# Altium PCB 56PCB -111.pcbdoc
Units mm, origin at the board's own origin, x right, y up, seen from the top; angles counter-clockwise.
Board outline 72.11 x 47.44 mm, 2 copper layers (Top Layer, Bottom Layer); 76 components, 155 nets, 310 pads, 138 vias.
Unrouted connection lines stored in the file: 101.
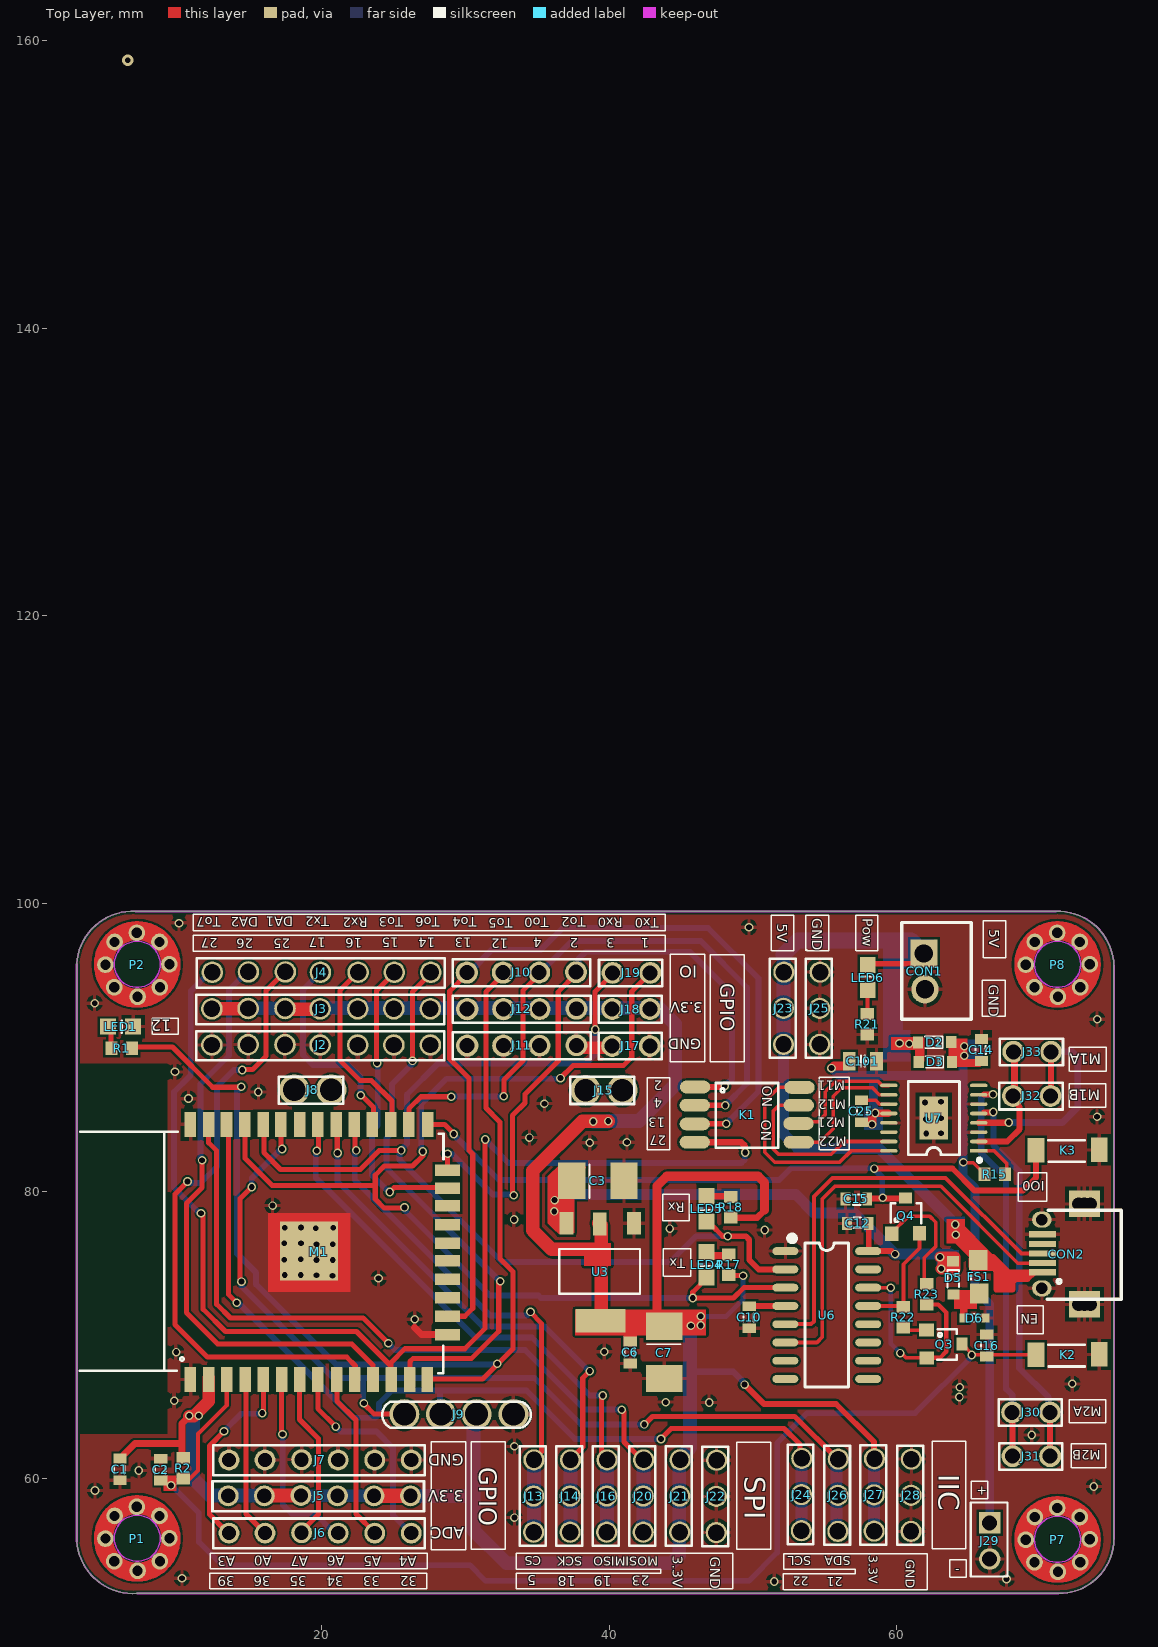
[diagram p0: Top Layer view]
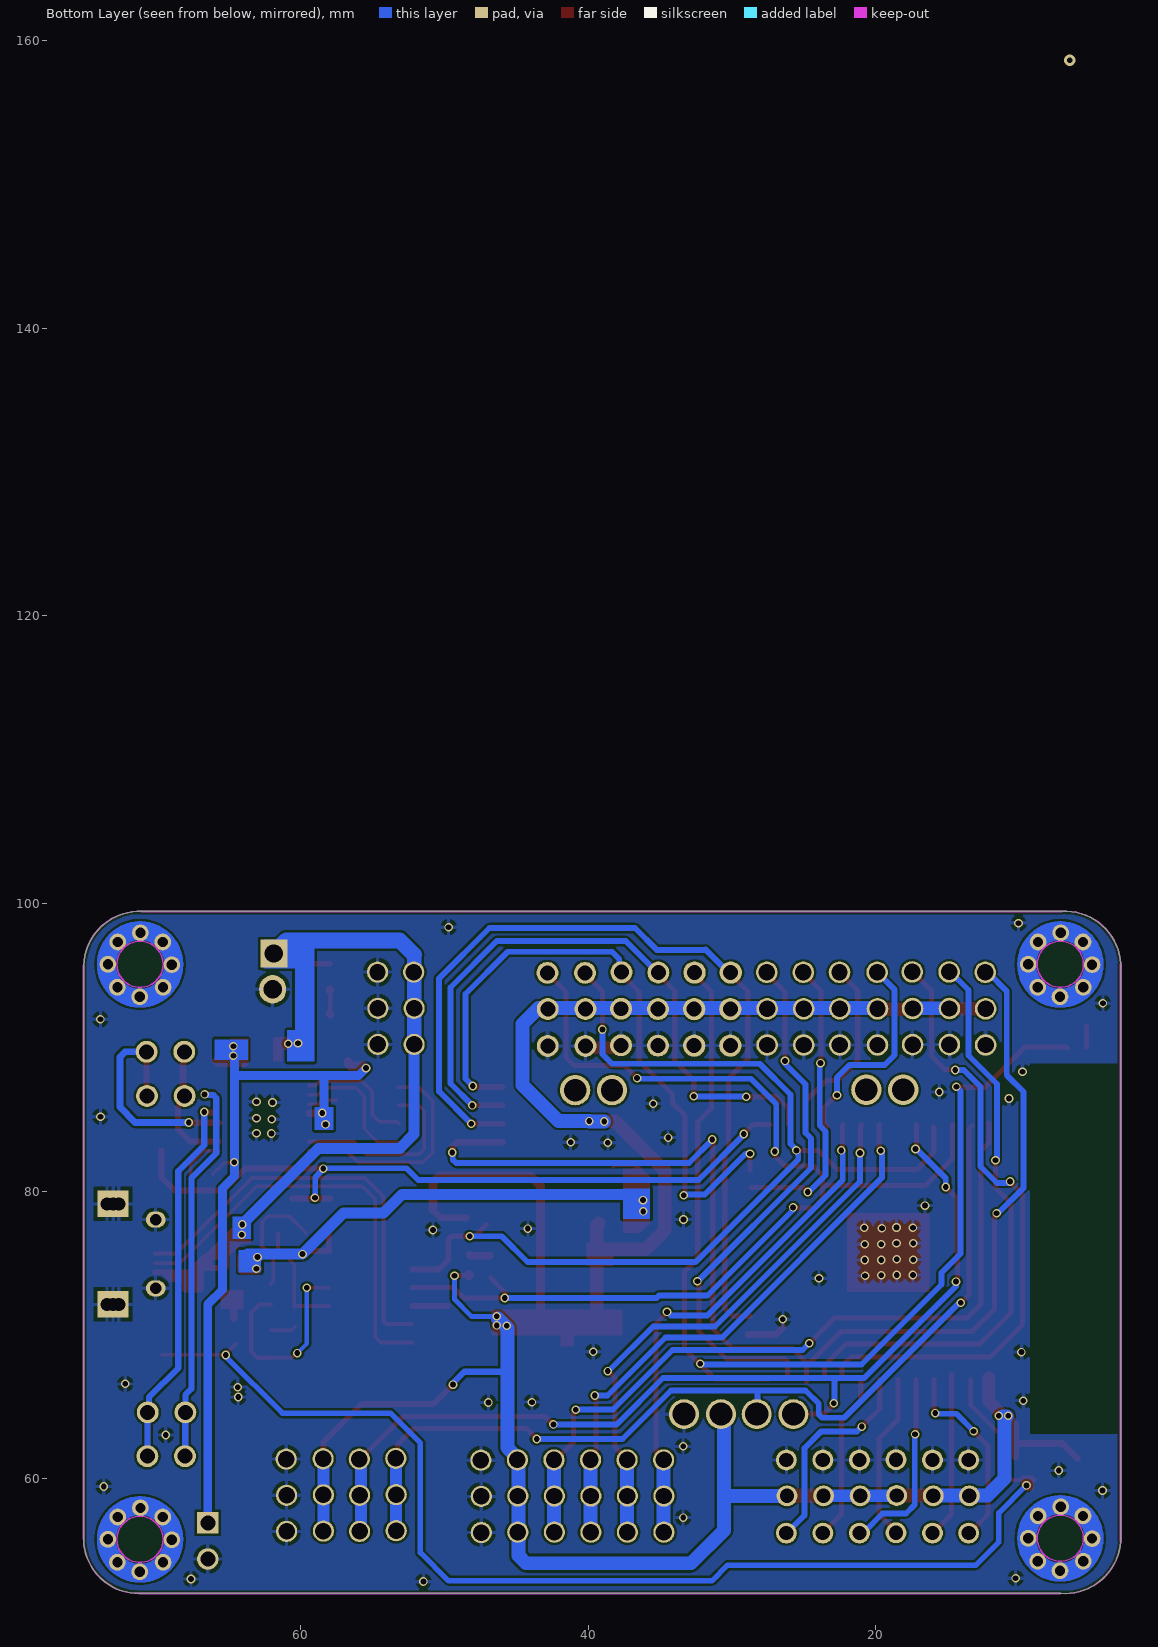
[diagram p1: Bottom Layer view, seen from below]

## Layer stack, top to bottom
Top Solder: solder mask 0.0102, Solder Resist, Dk 3.5
Top Layer: signal copper 0.0356
Dielectric 1: dielectric 0.32, FR-4, Dk 4.8
Bottom Layer: signal copper 0.0356
Bottom Solder: solder mask 0.0102, Solder Resist, Dk 3.5

## Board outline
2.975,55.651 2.975,95.783 cw(c6.847,95.569) 7.061,99.441 71.044,99.441 cw(c71.183,95.542) 75.082,95.682 75.082,55.804 cw(c71.26,55.842) 71.222,52.019 7.163,52.019 cw(c6.885,55.929)

## Design rules (kind name [scope] priority, off if disabled: settings)
Clearance [All] p1: gap=0.152 ignorepadtopadclearanceinfootprint=FALSE
HoleToHoleClearance [All] p1: gap=0.203 allowstackedmicrovias=TRUE
PolygonConnect [All] p1: connectstyle=Relief reliefconductorwidth=0.254 reliefentries=4 polygonreliefangle="90 Angle" airgapwidth=0.254
RoutingVias [All] p1: holewidth=6 width=8 viastyle="Through Hole" minholewidth=0.3 minwidth=0.6 maxholewidth=0.711 maxwidth=1.27
SilkToSilkClearance [All] p1: silktosilkclearance=0.152
SolderMaskExpansion [All] p1: expansion=0.102
Width [All] p1: maxlimit=5 minlimit=0.203 preferedwidth=0.254
28 further rules are at their usual default settings.

## Components (designator, comment, footprint, x,y, rotation, side; value= is the part's Value field where it differs from the comment)
C1 "104" COMPONENT_13 5.972,60.649 r90 top
C2 "104" COMPONENT_13 8.817,60.623 r90 top
C3 "100UF/10V" COMPONENT_17 39.195,80.715 r180 top
C6 "104" COMPONENT_13 41.456,68.777 r90 top
C7 "100UF/10V" COMPONENT_17 43.818,68.777 r90 top
C10 "104" COMPONENT_13 49.733,71.222 r90 top
C12 "104" COMPONENT_13 57.277,77.749 r0 top
C14 "104" COMPONENT_13 65.865,89.808 r90 top
C15 "104" COMPONENT_13 57.175,79.451 r180 top
C16 "104" COMPONENT_13 66.246,69.259 r90 top
C25 "10nf" COMPONENT_13 57.531,85.547 r270 top
C101 "10UF" "C 0805_L" 57.633,89.027 r180 top
CON1 "XH2.54MM*2P直针插座" COMPONENT_24 61.903,95.269 r90 top
CON2 "安卓尾插牛角5针USB插座" COMPONENT_25 71.656,75.609 r90 top
D2 "S4" COMPONENT_21 62.614,90.341 r0 top
D3 "S4" COMPONENT_21 62.665,88.97 r0 top
D5 "S4" COMPONENT_21 63.909,73.958 r90 top
D6 "NC" COMPONENT_22 65.382,71.164 r0 top
FS1 "FS" COMPONENT_23 65.687,74.034 r90 top
J2 "2.54排针13P黑色" COMPONENT_4 19.967,90.163 r90 top
J3 "2.54排针13P红色" COMPONENT_4 19.967,92.678 r90 top
J4 "2.54排针13P黄色" COMPONENT_4 19.993,95.218 r90 top
J5 "2.54排针6P红色" COMPONENT_1 19.84,58.82 r90 top
J6 "2.54排针6P蓝色" COMPONENT_1 19.891,56.229 r90 top
J7 "2.54排针6P黑色" COMPONENT_1 19.891,61.309 r90 top
J8 "2P圆孔排母DS18B20" COMPONENT_5 19.383,87.039 r90 top
J9 "4P圆孔排母DS18B20" COMPONENT_2 29.543,64.484 r90 top
J10 "NC" COMPONENT_6 33.886,95.193 r90 top
J11 "NC" COMPONENT_6 33.912,90.113 r90 top
J12 "NC" COMPONENT_6 33.912,92.653 r90 top
J13 "2.54排针3P白色" COMPONENT_3 34.75,58.794 r90 top
J14 "2.54排针3P绿色" COMPONENT_3 37.29,58.794 r90 top
J15 "2P圆孔排母DS18B20" COMPONENT_5 39.627,87.014 r90 top
J16 "2.54排针3P蓝色" COMPONENT_3 39.83,58.794 r90 top
J17 "NC" COMPONENT_7 41.506,90.087 r90 top
J18 "NC" COMPONENT_7 41.506,92.653 r90 top
J19 "NC" COMPONENT_7 41.532,95.167 r90 top
J20 "2.54排针3P黄色" COMPONENT_3 42.37,58.794 r90 top
J21 "2.54排针3P红色" COMPONENT_3 44.91,58.794 r90 top
J22 "2.54排针3P黑色" COMPONENT_3 47.45,58.769 r90 top
J23 "2.54排针3P红色" COMPONENT_3 52.124,92.703 r90 top
J24 "2.54排针3P蓝色" COMPONENT_3 53.368,58.896 r90 top
J25 "2.54排针3P黑色" COMPONENT_3 54.638,92.703 r90 top
J26 "2.54排针3P黄色" COMPONENT_3 55.908,58.845 r90 top
J27 "2.54排针3P红色" COMPONENT_3 58.423,58.871 r90 top
J28 "2.54排针3P黑色" COMPONENT_3 60.988,58.845 r90 top
J29 "NC" COMPONENT_8 66.449,55.67 r90 top
J30 "2.54排针2P蓝色" COMPONENT_7 69.319,64.611 r90 top
J31 "2.54排针2P黄色" COMPONENT_7 69.345,61.563 r90 top
J32 "2.54排针2P黄色" COMPONENT_7 69.37,86.607 r90 top
J33 "2.54排针2P蓝色" COMPONENT_7 69.396,89.681 r90 top
K1 "贴片拨码开关（4位，1.25mm脚间距）" COMPONENT_18 49.584,85.312 r90 top
K2 "3*4*2MM按键按钮 2脚" COMPONENT_19 71.859,68.624 r90 top
K3 "3*4*2MM按键按钮 2脚" COMPONENT_19 71.859,82.848 r90 top
LED1 "LED蓝" COMPONENT_11 6.023,91.433 r90 top
LED4 "LED蓝" COMPONENT_11 46.764,74.873 r0 top
LED5 "LED蓝" COMPONENT_11 46.764,78.759 r0 top
LED6 "LED蓝" COMPONENT_11 57.963,94.844 r180 top
M1 "ESP32-WROOM-32DC （WIFI&蓝牙模块）" COMPONENT_9 20.043,75.762 r90 top
P1 "NC" COMPONENT_26 7.191,55.823 r90 top
P2 "NC" COMPONENT_26 7.191,95.726 r90 top
P7 "NC" COMPONENT_26 71.174,55.746 r90 top
P8 "NC" COMPONENT_26 71.174,95.726 r90 top
Q3 "Y1" COMPONENT_20 63.223,69.361 r90 top
Q4 "Y1" COMPONENT_20 60.604,78.207 r180 top
R1 "510R" COMPONENT_10 6.099,89.909 r90 top
R2 "100K" COMPONENT_10 10.391,60.725 r180 top
R15 "47K" COMPONENT_10 66.802,81.178 r90 top
R17 "510R" COMPONENT_10 48.288,74.873 r180 top
R18 "510R" COMPONENT_10 48.441,78.86 r180 top
R21 "1K" COMPONENT_10 57.937,91.592 r180 top
R22 "10K" COMPONENT_10 60.452,71.222 r180 top
R23 "10K" COMPONENT_10 62.078,72.822 r180 top
U3 "AMS1117-3.3V" COMPONENT_14 39.373,74.365 r90 top
U6 "CH340C" SOP16_N 55.118,71.374 r0 top
U7 "DRV8833" TSSOP16_L 62.56,85.065 r180 top

## Footprints (in the part's own frame and the unit in brackets; to place one, negate y for a bottom-side part, rotate by r counter-clockwise, add the part's x,y. Pads: shape width x height; smd on the part's side, far side on the other; paste and mask are expansions set on the pad)
"C 0805_L" [mil] "无极性贴片电容"
  rect 35x50 smd: 1(-37.4,0) 2(37.4,0)
  silkscreen extent -10,-15 10,15, body extent -39,-24 39,24, height 20
COMPONENT_1 [mil]
  round 57.11 hole 39: 1(-0.5,-249.5) 2(-0.5,-149.5) 3(-0.5,-49.5) 4(0.5,50.5) 5(-0.5,150.5) 6(-0.5,249.5)
  silkscreen extent -43,-286 40,292
COMPONENT_2 [mil]
  round 82.11 hole 63: 1(0,149.5) 2(0,49.5) 3(0,-48.5) 4(0,-149.5)
  silkscreen extent -37,-197 34,210
COMPONENT_3 [mil]
  round 58 hole 45: 1(-99,0.5) 2(0,0.5) 3(99,-0.5)
  silkscreen extent -136,-33 136,39
COMPONENT_4 [mil]
  round 59 hole 45: 1(-0.5,299) 2(0.5,200) 3(0.5,99) 4(-0.5,3) 5(-0.5,-100) 6(-0.5,-199) 7(-0.5,-299)
  silkscreen extent -43,-337 38,342
COMPONENT_5 [mil]
  round 83 hole 61: 1(0,50.5) 2(0,-50.5)
  silkscreen extent -38,-84 36,92
COMPONENT_6 [mil]
  round 61 hole 41: 1(-0.25,149.25) 2(-0.25,50.25)
  round 60 hole 41: 3(-0.25,-48.75) 4(0.75,-149.75)
  silkscreen extent -37,-189 37,188
COMPONENT_7 [mil]
  round 60 hole 41: 1(0,51.5) 2(0,-51.5)
  silkscreen extent -37,-84 36,88
COMPONENT_8 [mil]
  rect 59x59 hole 41: 1(49.5,0)
  round 59 hole 41: 2(-49.5,0)
  silkscreen extent -98,-49 106,52
COMPONENT_9 [mil]
  rect 68x31.5 smd: 1(-349,361.13) 2(-349,311.13) 3(-349,261.13) 4(-349,211.13) 5(-349,161.13) 6(-349,111.13) 7(-349,62.13) 8(-349,12.13) 9(-349,-39.87) 10(-349,-88.87) 11(-349,-138.87) 12(-349,-188.87) 13(-349,-238.87) 14(-349,-287.87) 25(349,-288.87) 26(349,-236.87) 27(349,-187.87) 28(349,-136.87) 29(349,-87.87) 30(349,-37.87) 31(349,12.13) 32(349,62.13) 33(349,113.13) 34(349,161.13) 35(349,212.13) 36(349,262.13) 37(349,310.13) 38(349,361.13)
  rect 31.5x68 smd: 15(-226,-342.87) 16(-176,-342.87) 17(-125,-342.87) 18(-74,-342.87) 19(-24,-342.87) 20(24,-342.87) 21(74,-342.87) 22(126,-342.87) 23(174,-342.87) 24(224,-342.87)
  rect 161x159 smd: 39(3,36.13)
  silkscreen extent -332,-332 329,664
COMPONENT_10 [mil]
  rect 37x33 smd: 1(0,28) 2(0,-28)
COMPONENT_11 [mil]
  rect 43x44 smd: 1(0,34.5) 2(0,-34.5)
  silkscreen extent -18,-3 16,-3
COMPONENT_13 [mil]
  rect 27x36 smd: 1(30,0) 2(-30,0)
  silkscreen extent -11,-12 10,16
COMPONENT_14 [mil]
  rect 62x38 smd: 1(133.75,-92.5) 2(131.75,1.5) 3(133.75,92.5)
  rect 63x138 smd: 4(-133.25,-0.5)
  silkscreen extent -59,-108 63,112
COMPONENT_17 [mil]
  rect 74.84x101 smd: 1(71.25,0)
  rect 73.84x101 smd: 2(-71.75,0)
  silkscreen extent 22,-45 22,48
COMPONENT_18 [mil]
  oval 34.84x83 smd: 1(75.5,142.5) 2(25.5,143.5) 3(-25.5,143.5) 4(-75.5,143.5) 5(-75.5,-141.5) 6(-24.5,-140.5) 7(25.5,-141.5) 8(74.5,-143.5)
  silkscreen extent -91,-86 87,86
COMPONENT_19 [mil]
  rect 66.84x46 smd: 1(-0.5,86.5) 2(0.5,-86.5)
  silkscreen extent -32,-48 27,52
COMPONENT_20 [mil]
  rect 35.84x40 smd: 1(38,46) 2(-38,45)
  rect 35.84x30 smd: 3(0,-51)
  silkscreen extent -43,-37 41,17
COMPONENT_21 [mil]
  rect 27.84x33 smd: 1(-45.5,-0.5) 2(45.5,0.5)
  silkscreen extent -26,-16 22,16
COMPONENT_22 [mil]
  rect 23.84x24 smd: 1(-29,0) 2(29,0)
  silkscreen extent -9,-9 10,11
COMPONENT_23 [mil]
  rect 54.84x51 smd: 3(46,1) 4(-46,-1)
  silkscreen extent -8,-19 5,21
COMPONENT_24 [mil]
  rect 77.84x74 hole 50: 1(49,1.5)
  oval 77.84x74 hole 50: 2(-49,-1.5)
  silkscreen extent -131,-128 134,62
COMPONENT_25 [mil]
  rect 16.84x74 smd: 1(-49.5,60.25) 2(-24.5,60.25) 3(1.5,60.25) 4(27.5,60.25) 5(54.5,60.25)
  oval 43.84x54 hole 32: 6(-93.5,62.25) 7(94.5,62.25)
  rect 72.84x53 hole 36: 8(137.5,-38.75) 9(137.5,-70.75) 10(137.5,-53.75) 11(-137.5,-38.75) 12(-137.5,-70.75) 13(-137.5,-54.75)
  silkscreen extent -124,-155 121,47
COMPONENT_26 [mil]
  round 45.84 hole 28: 1(-61.5,63.5) 2(0.5,87.5) 3(62.5,62.5) 4(87.5,1.5) 5(62.5,-60.5) 6(1.5,-87.5) 7(-61.5,-61.5) 8(-87.5,-0.5)
  Top Layer circle w51.94: c1.08,0.5 r92.42
  Bottom Layer circle w51.94: c1.08,0.5 r92.42
  Keep-Out Layer circle w3.94: c1.37,0.5 r63.13
SOP16_N [mm] "10.3*6.2*1.8mm（长宽高）"
  oval 1.8x0.55 smd: 1(-2.877,4.445) 2(-2.877,3.175) 3(-2.877,1.905) 4(-2.877,0.635) 5(-2.877,-0.635) 6(-2.877,-1.905) 7(-2.877,-3.175) 8(-2.877,-4.445) 9(2.877,-4.445) 10(2.877,-3.175) 11(2.877,-1.905) 12(2.877,-0.635) 13(2.877,0.635) 14(2.877,1.905) 15(2.877,3.175) 16(2.877,4.445)
  silkscreen extent -2.57,-5 1.52,5.49, body extent -3,-5 3,5, height 1.9
TSSOP16_L [mm] "5*6.4*1mm（长宽高）"
  rect 2x3 smd: 0(0,0)
  rect 1.2x0.25 smd: 1(-3.125,2.275)
  oval 1.2x0.25 smd: 2(-3.125,1.625) 3(-3.125,0.975) 4(-3.125,0.325) 5(-3.125,-0.325) 6(-3.125,-0.975) 7(-3.125,-1.625) 8(-3.125,-2.275) 9(3.125,-2.275) 10(3.125,-1.625) 11(3.125,-0.975) 12(3.125,-0.325) 13(3.125,0.325) 14(3.125,0.975) 15(3.125,1.625) 16(3.125,2.275)
  silkscreen extent -3.3,-2.54 1.78,3.05, body extent -3.2,-2.5 3.2,2.5, height 1.03

## Via types
v1: diameter 0.6, hole 0.4, Top Layer to Bottom Layer, tented both sides, 137 vias
v2: diameter 0.8, hole 0.4, Top Layer to Bottom Layer, 1 vias

## Nets (pads, with @x,y where several pads share a name; then routed paths per layer and width w, separated by ;. In a path a pad name is that pad's centre, name@x,y a point inside that pad or via, vN(x,y) a via of type N, cw(c..) or ccw(c..) an arc to the next point about the centre after c; other vN are vias at no path point)
3.3V: C1.1 C6.1 C7.1 J3.1 J3.2 J3.3 J3.4 J3.5 J3.6 J3.7 J5.1 J5.2 J5.3 J5.4 J5.5 J5.6 J9.3 J12.1 J12.2 J12.3 J12.4 J18.1 J18.2 J21.1 J21.2 J21.3 J27.1 J27.2 J27.3 M1.2 R2.2 R17.1 R18.1 U3.2 U3.4 | length 193
  Top Layer w0.345: R17.1@48.332,74.117 v1(49.301,74.117)
  Top Layer w0.405: 54.864,65.195 55.762,65.195 58.397,62.56 58.397,61.36 J27.3@58.448,61.309
  Top Layer w0.43: v1(49.406,66.541) 50.752,65.195 54.864,65.195
  Top Layer w0.456: R18.1 R18.1@48.593,78.149 ; R18.1@48.593,78.073 R18.1@48.593,78.149 ; 50.8,78.667 50.282,78.149 R18.1@48.593,78.149
  Top Layer w0.481: C1.1 7.013,62.452 10.214,62.452 ; R2.2@10.29,61.512 10.29,63.824 v1@10.798,64.332
  Top Layer w0.633: C7.1 43.307,71.097 43.307,80.34 43.993,81.026 50.352,81.026 50.8,80.578 50.8,78.667
  Top Layer w0.71: v1@46.256,71.317 v1@46.307,71.317 ; v1(46.358,71.291) v1@46.384,71.317 ; R17.1 R17.1@48.332,74.117
  Top Layer w0.862: v1@10.798,64.332 11.103,64.332 12.144,65.373 M1.2@12.144,67.024
  Top Layer w0.938: J3.1@12.347,92.678 J3.2@15.09,92.678 ; J3.3@17.605,92.653 J3.4@19.993,92.653 ; v1(38.887,84.836) 38.11,84.836 34.674,81.4 34.674,77.26 35.995,75.939 39.424,75.939 ; v1(38.887,84.836) 39.903,84.836 v1(39.929,84.861) ; U3.2@39.271,77.768 39.424,77.616 39.424,75.939 ; U3.4@39.424,71.164 39.424,75.939 ; 39.5,75.939 39.424,75.939
  Top Layer w0.989: J5.5@16.043,58.832 J5.4 ; J5.2 J5.1
  Bottom Layer w0.345: v1(46.358,71.291) 48.126,71.291 49.301,72.466 v1(49.301,74.117)
  Bottom Layer w0.43: 45.85,67.43 48.618,67.43 49.406,66.643 v1(49.406,66.541) v1@49.406,66.465
  Bottom Layer w0.837: J27.1 J27.2 J27.3@58.41,61.525
  Bottom Layer w0.862: J5.4@18.583,58.807 J5.3 J5.2
  Bottom Layer w0.964: v1@11.179,64.332 10.925,64.332 11.052,64.205 11.052,60.014 12.246,58.82 J5.5@16.132,58.82 ; J3.2@14.786,92.703 J3.3@17.453,92.703 ; J3.4@19.993,92.729 43.462,92.729 44.58,91.611 44.58,87.379 42.062,84.861 v1(39.929,84.861) 39.903,84.836 v1(38.887,84.836) ; J5.1 30.521,58.807 ; J9.3 30.559,64.268 30.559,56.407 32.845,54.121 44.326,54.121 44.859,54.654 44.859,61.385 45.621,62.147 45.621,70.478 v1@46.282,71.139
  other v1: 10.798,64.382 11.458,64.382 45.672,70.631 46.358,70.656
+5v: C3.1 C12.1 D5.2 U3.3 U6.16 | length 43.5
  Top Layer w0.202: U3.3@37.087,77.26 36.35,77.26 35.791,77.819 35.791,80.969 36.604,81.781 38.154,81.781 C3.1@38.281,81.654
  Top Layer w0.405: C12.1 58.039,75.863 U6.16 59.612,75.819 59.815,75.616 v1(59.868,75.616)
  Top Layer w0.786: v1(62.995,75.406) 64.036,75.406 64.036,74.593 v1(63.071,74.593) ; 63.198,74.974 63.681,74.974 D5.2@63.757,74.898
  Bottom Layer w0.76: 36.909,79.749 52.962,79.749 54.232,78.479 57.004,78.479 v1(59.868,75.616) 62.785,75.616 v1(62.995,75.406) ; v1@62.995,75.635 63.706,75.635
  other v1: 36.172,78.581 36.198,79.368
AOUT1: J32.1 J33.1 U7.2 | length 8.9
  Top Layer w0.405: U7.2 67.666,83.44 68.529,84.303 68.529,85.837 68.062,86.305 J32.1
  Top Layer w0.481: J32.1@68.075,86.531 68.176,86.633 68.176,89.592 J33.1
AOUT2: J32.2 J33.2 U7.4 | length 15.9
  Top Layer w0.43: U7.4 65.695,84.75 67.757,84.75 v1(67.767,84.76) ; J32.2@70.678,86.798 70.704,86.823 J33.2
  Bottom Layer w0.481: v1(67.767,84.76) 71.501,84.76 72.568,85.827 72.568,89.329 72.216,89.681 J33.2 ; J33.2@70.615,89.554 J33.2@70.615,89.681
BOUT1: J30.1 J31.1 U7.7 | length 30.4
  Top Layer w0.43: U7.7@66.07,86.703 66.662,86.703 v1(66.675,86.716) ; J30.1 68.024,64.598 68.024,61.576 J31.1
  Bottom Layer w0.43: v1(66.675,86.716) 66.643,86.683 66.082,86.683 65.862,86.464 65.862,82.626 67.589,80.899 67.589,66.243 68.011,65.821 J30.1 68.024,64.598 68.024,61.576 J31.1
BOUT2: J30.2 J31.2 U7.5 | length 29.3
  Top Layer w0.43: U7.5@66.07,85.464 66.668,85.464 v1(66.7,85.496) ; J30.2 70.64,64.598 70.64,61.576 J31.2
  Bottom Layer w0.43: v1(66.7,85.496) 66.7,83.185 68.504,81.382 68.504,67.691 70.541,65.654 70.541,64.698 70.64,64.598 70.64,61.576 J31.2
D+: CON2.3 U6.5 | length 29.4
  Top Layer w0.278: U6.5 54.026,70.739 54.229,70.942 54.229,79.632 55.514,80.917 63.38,80.917 68.65,75.647 CON2.3
D-: CON2.2 U6.6 | length 30.2
  Top Layer w0.254: U6.6 54.432,69.469 54.813,69.85 54.813,79.451 55.69,80.328 63.055,80.328 68.396,74.987 CON2.2
DTR: Q4.2 R22.2 U6.13 | length 8
  Top Layer w0.252: U6.13 R22.2@60.376,72.009 ; R22.2 60.452,74.905 61.57,76.022 Q4.2
GND: C1.2 C2.1 C3.2 C6.2 C7.2 C10.2 C12.2 C14.1 C15.1 C16.1 C101.1 CON1.2 CON2.5 CON2.6 CON2.7 CON2.8 CON2.9 CON2.10 CON2.11 CON2.12 CON2.13 D6.2 J2.1 J2.2 J2.3 J2.4 J2.5 J2.6 J2.7 J7.1 J7.2 J7.3 J7.4 J7.5 J7.6 J9.4 J11.1 J11.2 J11.3 J11.4 J17.1 J17.2 J22.1 J22.2 J22.3 J25.1 J25.2 J25.3 J28.1 J28.2 J28.3 J29.2 K2.2 K3.2 LED1.2 M1.1 M1.15 M1.38 M1.39 R21.1 U3.1 U6.1 U7.0 U7.3 U7.6 U7.13 | length 5.1
  Top Layer w0.481: 26.47,70.504 26.952,70.021 M1.15@28.883,70.021
  Top Layer w0.837: J11.4@37.773,89.96 J17.1@40.211,89.96
  other v1: 51.463,52.851 67.618,53.029 10.29,53.079 33.404,57.296 4.245,59.175 73.688,59.455 7.293,60.572 33.404,62.249 69.37,63.036 46.942,65.297 43.919,65.322 9.756,65.424 64.341,65.678 64.366,66.364 72.19,66.592 9.883,68.802 39.652,68.827 26.47,71.088 23.955,73.933 20.755,74.111 19.637,74.136 17.427,74.161 18.545,74.161 19.637,75.203 20.78,75.203 17.402,75.228 18.545,75.254 19.637,76.295 20.78,76.295 17.402,76.371 18.57,76.371 50.8,77.292 44.199,77.387 19.586,77.413 17.427,77.438 20.805,77.438 18.57,77.463 33.378,78.022 16.589,78.987 38.636,83.356 41.224,83.388 34.445,83.712 62.027,83.998 63.068,84.023 62.001,84.988 63.068,85.065 73.914,85.166 35.487,86.074 61.951,86.157 63.068,86.208 10.747,86.43 15.598,86.887 9.807,88.284 73.917,91.941 4.219,93.059 49.711,98.342 10.087,98.622
M11: K1.8 U7.16 | length 15.6
  Top Layer w0.254: K1.8 51.771,87.204 50.8,86.233 50.8,82.702 51.511,81.991 56.007,81.991 56.805,82.79 U7.16
M12: K1.7 U7.15 | length 13.1
  Top Layer w0.254: K1.7 51.797,85.96 51.41,85.573 51.41,82.906 51.765,82.55 55.423,82.55 56.312,83.44 U7.15
M21: K1.6 U7.9 | length 8.6
  Top Layer w0.254: K1.6 53.273,84.81 54.508,84.81 55.016,85.319 55.016,86.919 55.728,87.63 58.674,87.63 58.964,87.34 U7.9
M22: K1.5 U7.10 | length 9.3
  Top Layer w0.254: K1.5 54.641,83.394 55.575,84.328 55.575,86.589 56.159,87.173 58.293,87.173 58.776,86.69 U7.10
Net: 
NewNet1: P8.1 P8.2 P8.3 P8.4 P8.5 P8.6 P8.7 P8.8
NewNet2: P7.1 P7.2 P7.3 P7.4 P7.5 P7.6 P7.7 P7.8
NewNet3: P2.1 P2.2 P2.3 P2.4 P2.5 P2.6 P2.7 P2.8
NewNet4: P1.1 P1.2 P1.3 P1.4 P1.5 P1.6 P1.7 P1.8
NewNet15: J10.4 K1.1 M1.24 | length 45.8
  Top Layer w0.354: M1.24 v1@28.752,82.591 ; v1(33.353,79.699) 33.277,79.775 33.277,85.261 34.14,86.125 34.14,86.734 36.452,89.046 36.452,93.846 J10.4@37.722,95.116
  Top Layer w0.405: K1.1 47.908,87.23 47.979,87.3 v1(48.031,87.3)
  Bottom Layer w0.405: v1(28.756,82.594) 29.06,82.594 31.905,79.749 33.302,79.749 v1(33.353,79.699) ; J10.4@37.849,95.345 37.849,96.132 38.357,96.64 45.596,96.64 48.539,93.697 48.539,87.808 v1(48.031,87.3)
NewNet16: J10.3 K1.2 M1.26 | length 45.4
  Top Layer w0.354: M1.26 26.06,85.715 26.901,86.557 v1(29.01,86.557) ; v1(32.667,86.582) 32.667,87.725 33.988,89.046 33.988,93.923 35.258,95.193 J10.3@35.258,95.269
  Top Layer w0.405: K1.2 45.942,85.957 48.054,85.957 v1(48.057,85.954)
  Bottom Layer w0.405: v1@29.035,86.582 v1(32.667,86.582) ; J10.3@35.131,95.345 35.36,95.345 37.392,97.377 46.358,97.377 49.581,94.154 49.581,87.478 v1(48.057,85.954)
NewNet17: J10.2 M1.14 R1.2 | length 76.5
  Top Layer w0.354: R1.2@6.734,89.96 6.785,90.011 9.629,90.011 12.423,87.217 v1@14.532,87.217 ; M1.14@27.435,66.922 31.194,66.922 33.302,69.031 33.302,74.39 32.388,75.304 32.388,84.804 31.423,85.769 31.423,93.846 J10.2@32.743,95.167
  Bottom Layer w0.405: v1(14.405,87.242) 14.125,86.963 14.125,75.635 15.446,74.314 15.446,73.501 21.009,67.938 v1@32.108,67.938
  other v1: 32.21,67.989
NewNet18: J10.1 K1.3 M1.16 | length 62.6
  Top Layer w0.354: M1.16 29.949,71.291 30.508,71.85 30.508,82.569 30.254,82.823 30.254,87.827 28.908,89.173 28.908,93.897 J10.1@30.095,95.085
  Top Layer w0.405: K1.3 45.948,84.674 48.123,84.674 v1(48.133,84.684)
  Bottom Layer w0.405: 31.829,96.767 35.233,96.767 36.757,98.291 46.866,98.291 50.368,94.789 50.368,86.919 v1(48.133,84.684)
  Bottom Layer w0.43: J10.1 30.248,95.186 31.829,96.767
NewNet19: J4.7 M1.13 | length 37.6
  Top Layer w0.354: M1.13@26.139,67.075 26.139,68.142 26.343,68.345 30.407,68.345 32.312,70.25 32.312,73.628 v1(32.413,73.73) ; v1(26.317,89.046) 26.317,93.846 J4.7@27.587,95.116
  Bottom Layer w0.405: v1(26.317,89.046) 26.317,88.843 24.895,87.42 24.895,84.042 24.514,83.661 24.514,81.604 v1@32.388,73.73
NewNet20: J4.6 M1.23 | length 20.6
  Top Layer w0.354: v1(23.853,88.893) 23.828,88.919 23.828,93.948 24.971,95.091 J4.6@25.073,95.091 ; v1(24.742,79.927) 25.047,80.232 M1.23@28.679,80.232
  Bottom Layer w0.405: v1(23.853,88.893) 23.904,88.843 23.904,84.55 23.498,84.144 23.498,81.096 24.666,79.927 v1(24.742,79.927)
NewNet21: J4.5 M1.27 | length 13.1
  Top Layer w0.354: J4.5@22.507,95.193 21.263,93.948 21.263,89.097 22.685,87.674 23.472,87.674 24.895,86.252 24.895,84.706 M1.27
NewNet22: J4.4 M1.28 | length 14.9
  Top Layer w0.354: v1@22.71,86.709 23.599,85.82 23.599,84.677 M1.28@23.422,84.499
  Bottom Layer w0.405: J4.4@19.993,95.294 18.697,93.999 18.697,89.452 19.383,88.766 21.847,88.766 22.71,87.903 v1(22.71,86.658)
NewNet23: J4.3 M1.10 | length 43.8
  Top Layer w0.354: v1@10.671,80.638 9.807,79.775 9.807,70.707 12.068,68.446 21.745,68.446 22.355,67.837 M1.10@22.355,67.049 ; v1@14.405,88.436 15.192,88.436 16.132,89.376 16.132,93.923 J4.3@17.529,95.32
  Bottom Layer w0.405: v1(10.671,80.664) 10.772,80.562 11.585,80.562 12.728,81.705 12.728,87.242 13.897,88.411 v1(14.481,88.411)
NewNet24: J4.2 M1.11 | length 41.1
  Top Layer w0.354: v1(11.687,82.137) 11.687,80.232 10.595,79.14 10.595,71.545 12.779,69.361 22.101,69.361 23.574,67.888 M1.11@23.574,66.973
  Bottom Layer w0.405: v1(11.687,82.137) 11.585,82.239 11.585,87.446 13.566,89.427 13.566,93.973 J4.2@14.913,95.32
NewNet25: J4.1 K1.4 M1.12 | length 85.4
  Top Layer w0.354: v1(11.611,78.454) 11.763,78.302 11.763,71.774 13.312,70.224 22.431,70.224 24.819,67.837 ; M1.12@24.819,66.745 24.819,68.065 25.784,69.031 29.949,69.031 31.346,70.428 v1@31.346,83.585
  Top Layer w0.456: K1.4 49.158,83.394 49.426,83.126 49.426,82.705 v1(49.454,82.677)
  Bottom Layer w0.405: v1(11.611,78.454) 11.509,78.454 9.731,80.232 9.731,86.887 10.899,88.055 10.899,93.897 J4.1@12.207,95.205 ; v1@31.372,83.559 32.991,81.94 49.179,81.94 49.416,82.178 49.416,82.64 v1(49.454,82.677)
  other v1: 31.372,83.585
NewNet26: J9.1 J26.1 J26.2 J26.3 M1.33 | length 69.6
  Top Layer w0.354: v1(14.43,73.704) 14.328,73.806 14.328,79.47 v1(15.141,80.283) ; v1@17.17,83.004 M1.33 ; v1@22.939,65.195 23.65,64.484 J9.1 ; v1(42.421,63.773) 42.446,63.773 43.005,64.332 52.886,64.332 J26.3@55.857,61.36
  Bottom Layer w0.405: v1(14.43,73.704) 14.43,73.374 20.805,66.999 34.801,66.999 38.027,63.773 42.319,63.773 v1@42.421,63.671 ; v1(15.141,80.283) 15.141,80.892 ; 15.408,81.159 15.141,80.892 ; v1@17.224,83.001 17.224,82.975 15.141,80.892 ; 22.888,66.973 22.888,65.297 v1(22.939,65.246)
  Bottom Layer w0.837: J26.1@55.807,56.305 J26.3@55.807,61.245
  other v1: 17.249,82.924
NewNet27: J9.2 J24.1 J24.2 J24.3 M1.36 | length 67.2
  Top Layer w0.354: M1.36@13.338,84.525 13.516,84.347 13.516,72.815 v1(14.1,72.231) ; v1@43.64,62.833 44.3,63.493 52.149,63.493 53.267,62.376 J24.3@53.267,61.385
  Bottom Layer w0.405: v1(14.1,72.231) 14.201,72.231 22.202,64.23 23.752,64.23 23.98,64.459 23.98,65.221 24.895,66.135 30.153,66.135 ; J9.2@28.222,64.382 28.222,65.983 ; 28.933,66.135 34.242,66.135 37.62,62.757 v1(43.589,62.757)
  Bottom Layer w0.837: J24.1 J24.3@53.355,61.385
NewNet28: J20.1 J20.2 J20.3 M1.37 | length 53.2
  Top Layer w0.354: M1.37@12.144,84.728 12.144,83.356 12.703,82.797 12.703,72.129 13.668,71.164 22.888,71.164 v1(24.641,69.412) ; v1@40.821,64.865 41.024,64.662 41.024,62.554 42.268,61.309 J20.3
  Bottom Layer w0.405: v1(24.641,69.412) 25.098,68.954 34.14,68.954 38.281,64.814 v1@40.795,64.814
  Bottom Layer w0.964: J20.1@42.383,56.305 J20.3
  other v1: 40.871,64.789
NewNet29: J16.1 J16.2 J16.3 M1.31 | length 39.5
  Top Layer w0.354: v1(19.662,82.797) 19.789,82.924 19.789,84.572 M1.31 ; v1@39.449,65.678 39.449,61.715 J16.3@39.779,61.385
  Bottom Layer w0.405: v1@19.586,82.823 19.586,80.918 30.686,69.818 34.623,69.818 38.662,65.779 v1(39.551,65.779)
  Bottom Layer w0.964: J16.1@39.843,56.305 J16.3
NewNet30: J14.1 J14.2 J14.3 M1.30 | length 38.6
  Top Layer w0.329: J14.3 J14.3@37.303,61.347
  Top Layer w0.354: M1.30 21.085,84.547 v1@21.085,82.67 ; J14.3@37.303,61.347 38.154,62.198 38.154,66.999 v1(38.636,67.481)
  Bottom Layer w0.405: v1(21.11,82.645) 21.11,80.664 31.194,70.58 35.487,70.58 v1@38.585,67.481
  Bottom Layer w0.964: J14.1@37.303,56.318 J14.3
NewNet31: J13.1 J13.2 J13.3 M1.29 | length 36
  Top Layer w0.329: v1@34.521,71.571 35.283,70.809 35.283,61.83 J13.3
  Top Layer w0.354: M1.29 22.329,84.572 22.329,82.899 v1(22.406,82.823)
  Bottom Layer w0.405: v1(22.406,82.823) 22.304,82.721 22.304,80.765 31.727,71.342 34.267,71.342 v1(34.521,71.596)
  Bottom Layer w0.964: J13.1@34.763,56.305 J13.3
NewNet32: J6.6 M1.5 | length 13.4
  Top Layer w0.354: v1(13.211,63.29) 12.195,62.274 12.195,57.524 J6.6@13.389,56.331 ; v1(15.878,64.56) 15.951,64.633 M1.5
  Bottom Layer w0.405: v1(13.211,63.29) 13.211,63.316 14.405,64.509 15.827,64.509 v1(15.878,64.56)
NewNet33: J6.5 M1.4 | length 11.6
  Top Layer w0.354: M1.4@14.735,67.227 14.735,57.55 J6.5
NewNet34: J6.4 M1.7 | length 11.5
  Top Layer w0.354: M1.7 18.465,64.106 19.789,62.782 19.789,57.524 J6.4@18.672,56.407
NewNet35: J6.3 M1.6 | length 13.3
  Top Layer w0.354: v1@17.221,63.141 M1.6
  Bottom Layer w0.405: v1@17.3,63.163 17.3,58.189 17.914,57.575 19.535,57.575 20.78,56.331 J6.3@21.059,56.331
  other v1: 17.275,63.087
NewNet36: J6.2 M1.9 | length 11.8
  Top Layer w0.354: M1.9 21.056,65.402 22.38,64.078 22.38,57.55 23.688,56.242 J6.2
NewNet37: J6.1 M1.8 | length 14.8
  Top Layer w0.354: M1.8 19.735,64.868 v1(20.983,63.62)
  Bottom Layer w0.405: v1(20.983,63.62) 21.313,63.29 23.803,63.29 24.968,62.125 24.968,57.451 26.203,56.216 J6.1
NewNet38: 
NewNet39: 
NewNet40: 
NewNet41: 
NewNet42: 
NewNet43: 
NewNet44: 
NewNet45: 
NewNet46: 
NewNet47: 
NewNet48: 
NewNet49: 
NewNet50: 
NewNet51: 
NewNet52: 
NewNet53: 
NewNet54: 
NewNet55: 
NewNet56: 
NewNet57: 
NewNet58: 
NewNet59: 
NewNet60: 
NewNet61: 
NewNet62: 
NewNet63: 
NewNet64: 
NewNet65: 
NewNet66: 
NewNet67: 
NewNet68: 
NewNet69: 
NewNet70: 
NewNet71: 
NewNet72: 
NewNet73: 
NewNet74: 
NewNet75: 
NewNet76: 
NewNet77: 
NewNet78: 
NewNet79: 
NewNet80: 
NewNet81: 
NewNet82: 
NewNet83: 
NewNet84: 
NewNet85: 
NewNet86: 
NewNet87: 
NewNet88: 
NewNet89: 
NewNet90: 
NewNet91: 
NewNet92: 
NewNet93: 
NewNet94: 
NewNet95: 
NewNet96: 
NewNet97: 
NewNet100: D5.1 D6.1 FS1.4 | length 2.4
  Top Layer w0.532: D6.1 64.646,72.206 65.23,72.79 FS1.4@65.789,72.79
NewNet102: C15.2 K3.1 M1.25 Q4.3 | length 52.1
  Top Layer w0.354: M1.25 28.552,84.626 29.187,83.991 v1(29.187,83.966)
  Top Layer w0.405: C15.2 57.963,79.477 60.579,79.477 Q4.3 ; v1(58.42,81.559) 63.856,81.559 65.38,80.035 68.758,80.035 69.662,80.94 K3.1
  Bottom Layer w0.405: v1(29.187,83.966) 29.187,83.915 32.337,80.765 51.819,80.765 52.638,81.585 58.395,81.585 v1(58.42,81.559) 58.42,81.507 58.979,80.948 58.979,79.553 v1(59.004,79.527)
NewNet104: Q4.1 R23.2 | length 8.5
  Top Layer w0.254: Q4.1 59.639,77.091 60.806,78.257 62.255,78.257 62.687,77.826 62.687,76.139 61.9,75.351 61.9,73.711 R23.2
NewNet105: C2.2 C16.2 K2.1 M1.3 Q3.3 R2.1 | length 86
  Top Layer w0.252: Q3.3 65.268,68.611 K2.1
  Top Layer w0.303: C2.2@8.944,59.912 10.747,59.912 11.407,60.572 11.407,63.112 13.411,65.116 M1.3
  Bottom Layer w0.379: v1@9.452,59.531 9.553,59.531 11.458,57.626 11.458,55.594 13.058,53.994 30.305,53.994 31.397,52.902 49.711,52.902 51.666,54.857 51.666,62.477 53.749,64.56 61.268,64.56 v1@65.205,68.497
  other v1: 9.528,59.531 65.205,68.599
NewNet107: Q3.1 R22.1 | length 1.8
  Top Layer w0.252: R22.1@60.376,70.561 60.611,70.326 Q3.1
NewNet112: 
NewNet113: 
NewNet115: LED6.1 R21.2 | length 1.7
  Top Layer w0.305: R21.2@57.95,92.316 LED6.1@57.95,93.955
  Top Layer w0.608: R21.2 R21.2@57.95,92.316 ; LED6.1@57.95,93.955 LED6.1
NewNet116: LED5.1 R18.2 | length 1.8
  Top Layer w0.456: LED5.1 R18.2@48.58,79.635
NewNet117: LED4.1 R17.2 | length 1.5
  Top Layer w0.506: LED4.1@46.84,75.508 48.212,75.508 R17.2
NewNet118: LED1.1 R1.1 | length 1.5
  Top Layer w0.354: R1.1@5.362,89.986 LED1.1@5.362,91.459
NewNet119: 
NewNet120: 
NewNet121: 
NewNet122: 
NewNet123: 
NewNet124: 
NewNet125: 
NewNet126: 
NewNet127: 
NewNet128: 
NewNet129: 
NewNet130: 
NewNet131: 
NewNet132: 
NewNet133: 
NewNet134: 
NewNet135: 
NewNet136: 
NewNet137: 
NewNet138: 
NewNet139: 
NewNet140: 
NewNet141: 
NewNet142: 
NewNet143: 
NewNet144: 
NewNet145: 
NewNet146: 
NewNet147: 
NewNet148: 
NewNet149: 
NewNet150: 
NewNet151: 
R1: C25.2 U7.11 | length 2
  Top Layer w0.254: C25.2 58.522,86.309 58.791,86.04 U7.11
R2: R15.2 U7.1 | length 3.3
  Top Layer w0.254: U7.1 66.766,82.79 67.64,81.915 R15.2@67.64,80.975
RTS: Q3.2 R23.1 U6.14 | length 14.2
  Top Layer w0.252: U6.14 v1(59.563,73.279) ; v1(60.223,68.732) 60.317,68.732 60.654,68.396 Q3.2
  Top Layer w0.303: R23.1 62.865,72.111 63.424,71.552 63.424,68.834 62.985,68.396 Q3.2
  Bottom Layer w0.303: v1(59.563,73.279) 59.563,69.393 v1(60.223,68.732)
RXD: J19.2 LED4.2 M1.35 U6.3 | length 77.3
  Top Layer w0.354: M1.35 14.684,84.598 14.684,82.264 16.564,80.384 23.726,80.384 ; v1@25.708,78.81 24.361,78.81 23.726,79.445 23.726,81.096 24.361,81.731 26.317,81.731 27.028,82.442 v1(27.028,82.747) ; v1(36.604,87.852) 37.468,88.716 40.973,88.716 41.557,89.3 41.557,93.872 42.878,95.193 J19.2@42.929,95.193 ; LED4.2 46.764,73.933 45.799,72.968 v1(45.799,72.561) 48.634,72.561 49.352,73.279 U6.3
  Bottom Layer w0.405: v1(25.758,78.86) 25.758,78.683 31.702,72.739 35.077,72.739 35.255,72.561 v1(45.799,72.561) ; v1(27.028,82.747) 26.927,82.848 26.927,86.049 28.679,87.801 v1@36.528,87.801
TXD: J19.1 LED5.2 M1.34 U6.2 | length 71.5
  Top Layer w0.354: M1.34@15.979,84.448 15.979,82.67 17.148,81.502 22.685,81.502 24.006,82.823 v1(25.53,82.823) ; v1@39.068,91.154 39.017,91.205 39.017,93.872 J19.1@40.313,95.167 ; LED5.2@47.069,77.667 47.882,76.854 v1(48.237,76.854)
  Top Layer w0.405: v1(48.237,76.854) 49.496,76.854 49.733,76.617 49.733,75.209 50.394,74.549 U6.2
  Bottom Layer w0.405: v1(39.017,91.23) 39.017,89.503 38.357,88.843 28.07,88.843 25.936,86.709 25.936,83.28 25.403,82.747 25.403,82.188 32.534,75.057 44.225,75.057 46.022,76.854 v1(48.237,76.854)
V3: C10.1 U6.4 | length 2.5
  Top Layer w0.405: C10.1 49.746,71.996 52.228,71.996 U6.4
VBUS: 
VIN: CON1.1 CON2.1 D2.1 D3.1 FS1.3 J23.1 J23.2 J23.3 LED6.2 | length 60.4
  Top Layer w0.379: LED6.2@57.937,95.796 61.211,95.796 CON1.1@61.852,96.437
  Top Layer w0.405: FS1.3@65.332,75.431 65.179,75.279 65.179,74.746 65.281,74.644 66.703,74.644 66.906,74.441 66.906,73.145 68.024,73.145 68.049,73.171 68.049,73.679 68.253,73.882 69.065,73.882 CON2.1@69.535,74.352 ; FS1.3@65.482,75.431 66.301,75.431 66.678,75.431 67.757,74.352 CON2.1@69.535,74.352 ; CON2.1 CON2.1@69.535,74.352
  Top Layer w0.76: v1(64.059,77.673) 66.301,75.431 66.637,75.095 ; v1(64.084,76.962) 64.084,76.829 FS1.3@65.482,75.431
  Bottom Layer w0.735: v1@60.175,90.062 60.328,89.909
  Bottom Layer w0.76: J23.1 52.111,83.957 53.099,82.969 58.763,82.969 63.829,77.903 63.829,77.852 64.008,77.673 v1(64.059,77.673) 64.084,77.648 64.084,77.292
  Bottom Layer w1: J23.1 J23.2 52.111,96.424
  Bottom Layer w1.091: 52.111,96.424 53.114,97.428
  Bottom Layer w1.116: 53.114,97.428 60.988,97.428 CON1.1@61.801,96.615
  other v1: 60.858,90.246 60.175,90.265
VM: C14.2 C25.1 C101.2 D2.2 D3.2 J29.1 R15.1 U7.12 | length 52.8
  Top Layer w0.254: v1(64.618,81.991) 64.638,81.971 65.299,81.971 65.748,81.521 65.799,81.521 66.091,81.229 R15.1
  Top Layer w0.5: v1@58.698,85.407 U7.12@59.417,85.407
  Top Layer w0.557: D3.2@63.909,88.893 65.713,88.893 C14.2
  Top Layer w0.608: v1(55.448,88.544) 55.6,88.696 56.542,88.696 56.683,88.837 C101.2 ; v1(58.268,84.633) 58.268,85.192 v1(58.496,85.42)
  Bottom Layer w0.608: v1(55.448,88.544) 55.956,88.036 58.395,88.036 ; v1(58.496,85.42) 58.481,85.42 58.376,85.525 58.376,88.018 58.395,88.036 ; v1@64.592,89.401 64.592,88.036 ; v1@64.593,89.401 v1(64.671,89.401) ; v1@64.632,89.441 64.824,89.633 v1@64.824,89.82 ; J29.1 66.449,72.126 65.43,73.145 65.43,80.188 64.592,81.026 64.592,88.036 ; 58.395,88.036 64.592,88.036
  other v1: 64.671,90.062
pads on no net: CON2.4 J8.1 J8.2 J15.1 J15.2 M1.17 M1.18 M1.19 M1.20 M1.21 M1.22 M1.32 U6.7 U6.8 U6.9 U6.10 U6.11 U6.12 U6.15 U7.8 U7.14
copper on no net:
  other v2: 6.528,158.623

## Polygon pours and split planes (outlines as drawn)
GND on Top Layer "GND-No Net" (solid, remove dead copper, pour order 19): 3,96.31 cw(c6.15,96.31) 6.15,99.46 72.037,99.46 cw(c72.037,96.234) 75.263,96.234 75.263,55.035 cw(c72.164,55.035) 72.164,51.936 6.404,51.936 cw(c6.404,55.34) 3,55.34
GND on Bottom Layer "GND-No Net" (solid, remove dead copper, pour order 18): 3,96.31 cw(c6.15,96.31) 6.15,99.46 72.037,99.46 cw(c72.037,96.234) 75.263,96.234 75.263,55.035 cw(c72.164,55.035) 72.164,51.936 6.404,51.936 cw(c6.404,55.34) 3,55.34

## Keep-outs
Keep-Out Layer:
  the board outline again, w0.102

## Other copper
Top Layer:
  region net VIN: 64.722,76.346 64.722,77.552 63.452,77.552 63.452,76.346
  region net VIN: 64.719,76.848 64.719,78.054 63.449,78.054 63.449,76.848
  region net VIN: 68.253,73.145 68.253,74.352 66.983,74.352 66.983,73.145
  region net +5v: 37.201,77.65 36.363,78.462 35.69,77.768 36.528,76.955
  region net +5v: 36.48,80.215 37.369,81.028 36.68,81.781 35.791,80.969
  region net +5v: 36.782,77.819 36.782,80.994 35.791,80.994 35.791,77.819
  region net +5v: 37.569,77.082 37.569,81.565 36.388,81.565 36.388,77.082
  region net VIN: 61.903,89.02 61.903,90.671 61.268,90.671 61.268,89.02
  region net VIN: 61.826,89.808 61.826,90.697 59.591,90.697 59.591,89.808
  region net VM: 64.9,88.995 64.9,90.621 63.579,90.621 63.579,88.995
  region net VIN: 66.513,74.86 67.389,73.984 67.757,74.352 66.881,75.228
  region net VIN: 69.091,73.933 69.091,74.238 68.176,74.238 68.176,73.933
  region net VIN: 66.881,74.644 66.881,75.381 66.094,75.381 66.094,74.644
  region net NewNet100: 65.56,71.799 65.56,73.12 63.96,73.12 63.96,71.799
  region net 3.3V: 41.913,69.183 41.913,70.326 40.998,70.326 40.998,69.183
  region net 3.3V: 46.739,69.97 46.739,71.774 37.62,71.774 37.62,69.97
  region net 3.3V: 40.135,74.796 40.135,76.371 38.23,76.371 38.23,74.796
  region net NewNet105: 9.909,59.15 9.909,60.217 8.994,60.217 8.994,59.15
  rectangle net GND: 16.284,72.993 21.999,78.454
  pour cut-out: 2.949,63.087 9.299,63.087 9.299,88.868 2.949,88.868
Bottom Layer:
  region net VM: 59.036,85.829 57.715,85.829 57.715,84.229 59.036,84.229
  region net VM: 65.992,89.097 65.992,90.544 63.655,90.544 63.655,89.097
  region net VIN: 64.719,76.657 64.719,78.232 63.449,78.232 63.449,76.657
  region net VIN: 62.588,95.472 62.588,97.479 59.947,97.479 59.947,95.472
  region net VIN: 60.404,91.078 60.404,97.199 59.032,97.199 59.032,91.078
  region net VIN: 60.937,88.995 60.937,91.179 59.032,91.179 59.032,88.995
  region net +5v: 64.316,74.339 64.316,75.914 62.741,75.914 62.741,74.339
  region net +5v: 37.595,78.048 37.595,80.181 35.69,80.181 35.69,78.048
  pour cut-out: 2.949,63.087 9.299,63.087 9.299,88.868 2.949,88.868

## Silkscreen, mask and mechanical layers (free items; w line width, h text height)
Top Overlay:
  lines w0.1: 8.207,90.9 8.207,92.018 10.036,92.018 10.036,90.9 8.258,90.9 ; 11.077,96.691 11.077,97.783 43.894,97.783 43.894,96.666 11.077,96.666 11.077,96.742 ; 12.22,52.343 12.22,53.435 27.308,53.435 27.308,52.343 12.246,52.343 ; 42.7,82.874 44.199,82.874 44.199,87.877 42.649,87.877 42.649,82.874 42.776,82.874 ; 43.767,74.06 43.767,75.99 45.647,75.99 45.647,74.06 43.792,74.06 ; 48.847,55.086 51.235,55.086 51.235,62.528 48.872,62.528 48.872,55.086 ; 51.26,96.691 51.26,99.155 52.835,99.155 52.835,96.691 51.285,96.691 ; 52.098,52.292 52.098,53.384 57.102,53.384 57.102,53.714 52.124,53.714 52.124,54.781 62.106,54.781 62.106,52.292 52.124,52.292 ; 53.673,96.691 53.673,99.155 55.248,99.155 55.248,96.691 53.724,96.691 53.724,96.793 ; 54.613,82.874 54.613,87.903 56.696,87.903 56.696,82.874 54.638,82.874 ; 57.127,96.691 57.127,99.18 58.651,99.18 58.651,96.691 57.153,96.691 ; 63.655,53.156 63.655,54.349 64.824,54.349 64.824,53.156 63.706,53.156 ; 65.992,96.234 65.992,98.774 67.567,98.774 67.567,96.234 66.043,96.234 ; 68.43,79.292 68.43,81.273 70.412,81.273 70.412,79.292 68.456,79.292 ; 71.961,63.874 71.961,65.5 74.501,65.5 74.501,63.874 71.986,63.874 ; 71.961,85.82 71.961,87.471 74.526,87.471 74.526,85.82 71.986,85.82 ; 71.986,88.335 71.986,90.011 74.552,90.011 74.552,88.335 72.012,88.335 ; 72.113,60.776 72.113,62.427 74.501,62.427 74.501,60.776 72.139,60.776 ; 11.077,98.088 43.894,98.088 43.894,99.231 11.077,99.231 11.077,98.088 ; 12.246,53.74 27.333,53.74 27.333,54.832 12.246,54.832 12.246,53.74 ; 27.613,55.061 30.026,55.061 30.026,62.554 27.613,62.554 27.613,55.061 ; 30.407,55.086 32.769,55.086 32.769,62.554 30.407,62.554 30.407,55.086 ; 33.531,52.343 48.593,52.343 48.593,54.807 33.531,54.807 33.531,53.714 43.589,53.714 43.589,53.435 33.531,53.435 33.531,52.343 ; 43.716,77.921 45.57,77.921 45.57,79.775 43.716,79.775 43.716,77.921 ; 44.224,88.97 46.637,88.97 46.637,96.463 44.224,96.463 44.224,88.97 ; 47.018,88.995 49.38,88.995 49.38,96.437 47.018,96.437 47.018,88.995 ; 62.461,55.137 64.798,55.137 64.798,62.604 62.461,62.604 62.461,55.137 ; 65.154,58.591 66.297,58.591 66.297,59.836 65.154,59.836 65.154,58.591 ; 65.916,92.145 67.516,92.145 67.516,94.659 65.916,94.659 65.916,92.145 ; 68.354,70.072 70.183,70.072 70.183,72.028 68.354,72.028 68.354,70.072
  text "DA1" at 18.011,99.053 h0.66 r180
  text "Tx2" at 20.526,99.053 h0.66 r180
  text "To7" at 12.982,99.028 h0.66 r180
  text "DA2" at 15.598,99.028 h0.66 r180
  text "To3" at 25.657,99.028 h0.66 r180
  text "To6" at 28.197,99.028 h0.66 r180
  text "To4" at 30.788,99.028 h0.66 r180
  text "To2" at 38.357,99.028 h0.66 r180
  text "Rx2" at 23.218,99.003 h0.66 r180
  text "To0" at 35.791,99.003 h0.66 r180
  text "Rx0" at 40.948,99.003 h0.66 r180
  text "To5" at 33.302,98.977 h0.66 r180
  text "Tx0" at 43.437,98.977 h0.66 r180
  text "GND" at 54.105,98.952 h0.71 r270
  text "Pow" at 57.61,98.952 h0.71 r270
  text "5V" at 51.666,98.571 h0.71 r270
  text "5V" at 66.398,98.19 h0.71 r270
  text "17" at 20.297,97.606 h0.66 r180
  text "15" at 25.352,97.606 h0.66 r180
  text "14" at 27.892,97.606 h0.66 r180
  text "13" at 30.432,97.606 h0.66 r180
  text "4" at 35.309,97.606 h0.66 r180
  text "27" at 12.779,97.58 h0.66 r180
  text "16" at 22.837,97.58 h0.66 r180
  text "2" at 37.849,97.58 h0.66 r180
  text "3" at 40.389,97.58 h0.66 r180
  text "1" at 42.776,97.58 h0.66 r180
  text "26" at 15.243,97.555 h0.66 r180
  text "25" at 17.808,97.555 h0.66 r180
  text "12" at 32.972,97.555 h0.66 r180
  text "IO" at 46.129,95.675 h0.84 r180
  text "GPIO" at 47.704,94.456 h0.99 r270
  text "GND" at 66.373,94.329 h0.71 r270
  text "3.3V" at 46.485,93.11 h0.74 r180
  text "12" at 9.553,91.916 h0.79 r180
  text "GND" at 46.383,90.57 h0.74 r180
  text "M1A" at 74.196,89.554 h0.74 r180
  text "2" at 43.665,87.649 h0.66 r180
  text "M11" at 56.416,87.649 h0.66 r180
  text "M1B" at 74.145,87.039 h0.74 r180
  text "4" at 43.665,86.455 h0.66 r180
  text "M12" at 56.467,86.353 h0.66 r180
  text "13" at 43.894,85.083 h0.66 r180
  text "M21" at 56.416,85.083 h0.66 r180
  text "27" at 43.97,83.839 h0.66 r180
  text "M22" at 56.518,83.763 h0.66 r180
  text "IO0" at 70.285,80.664 h0.66 r180
  text "Rx" at 45.24,79.191 h0.66 r180
  text "Tx" at 45.266,75.304 h0.66 r180
  text "EN" at 69.827,71.418 h0.66 r180
  text "M2A" at 74.222,65.017 h0.66 r180
  text "M2B" at 74.171,61.969 h0.66 r180
  text "GND" at 29.873,61.715 h0.79 r180
  text "GPIO" at 30.965,60.801 h1.22 r270
  text "IIC" at 62.919,60.318 h1.42 r270
  text "SPI" at 49.406,60.166 h1.42 r270
  text "3.3V" at 29.873,59.201 h0.79 r180
  text "+" at 65.535,58.896 h0.64
  text "ADC" at 29.924,56.635 h0.79 r180
  text "3.3V" at 58.042,54.68 h0.64 r270
  text "A0" at 16.538,54.629 h0.69 r180
  text "A6" at 21.593,54.629 h0.69 r180
  text "3.3V" at 44.427,54.629 h0.71 r270
  text "A3" at 13.998,54.603 h0.69 r180
  text "A7" at 19.078,54.603 h0.69 r180
  text "A5" at 24.133,54.603 h0.69 r180
  text "A4" at 26.622,54.603 h0.69 r180
  text "CS" at 35.258,54.603 h0.64 r180
  text "SCL" at 54.054,54.603 h0.64 r180
  text "SDA" at 56.772,54.603 h0.64 r180
  text "SCK" at 38.103,54.578 h0.64 r180
  text "MOSIMISO" at 43.386,54.578 h0.64 r180
  text "GND" at 47.018,54.578 h0.71 r270
  text "GND" at 60.607,54.349 h0.64 r270
  text "-" at 64.036,53.41 h0.64
  text "5" at 34.928,53.283 h0.71 r180
  text "23" at 42.827,53.257 h0.71 r180
  text "36" at 16.462,53.232 h0.69 r180
  text "35" at 18.977,53.232 h0.69 r180
  text "32" at 26.647,53.232 h0.69 r180
  text "18" at 37.671,53.232 h0.71 r180
  text "19" at 40.186,53.232 h0.71 r180
  text "39" at 13.947,53.206 h0.69 r180
  text "34" at 21.542,53.206 h0.69 r180
  text "33" at 24.082,53.206 h0.69 r180
  text "22" at 53.851,53.181 h0.64 r180
  text "21" at 56.213,53.156 h0.64 r180

## Text inside footprints (layer, text, board x,y; h text height)
K1: Top Overlay "NO" at 51.323,85.807 h0.71 r90; Top Overlay "NO" at 51.273,83.47 h0.71 r90